# EAGLE board Creaky-Capreolus.postroute (EAGLE 7.4.0)
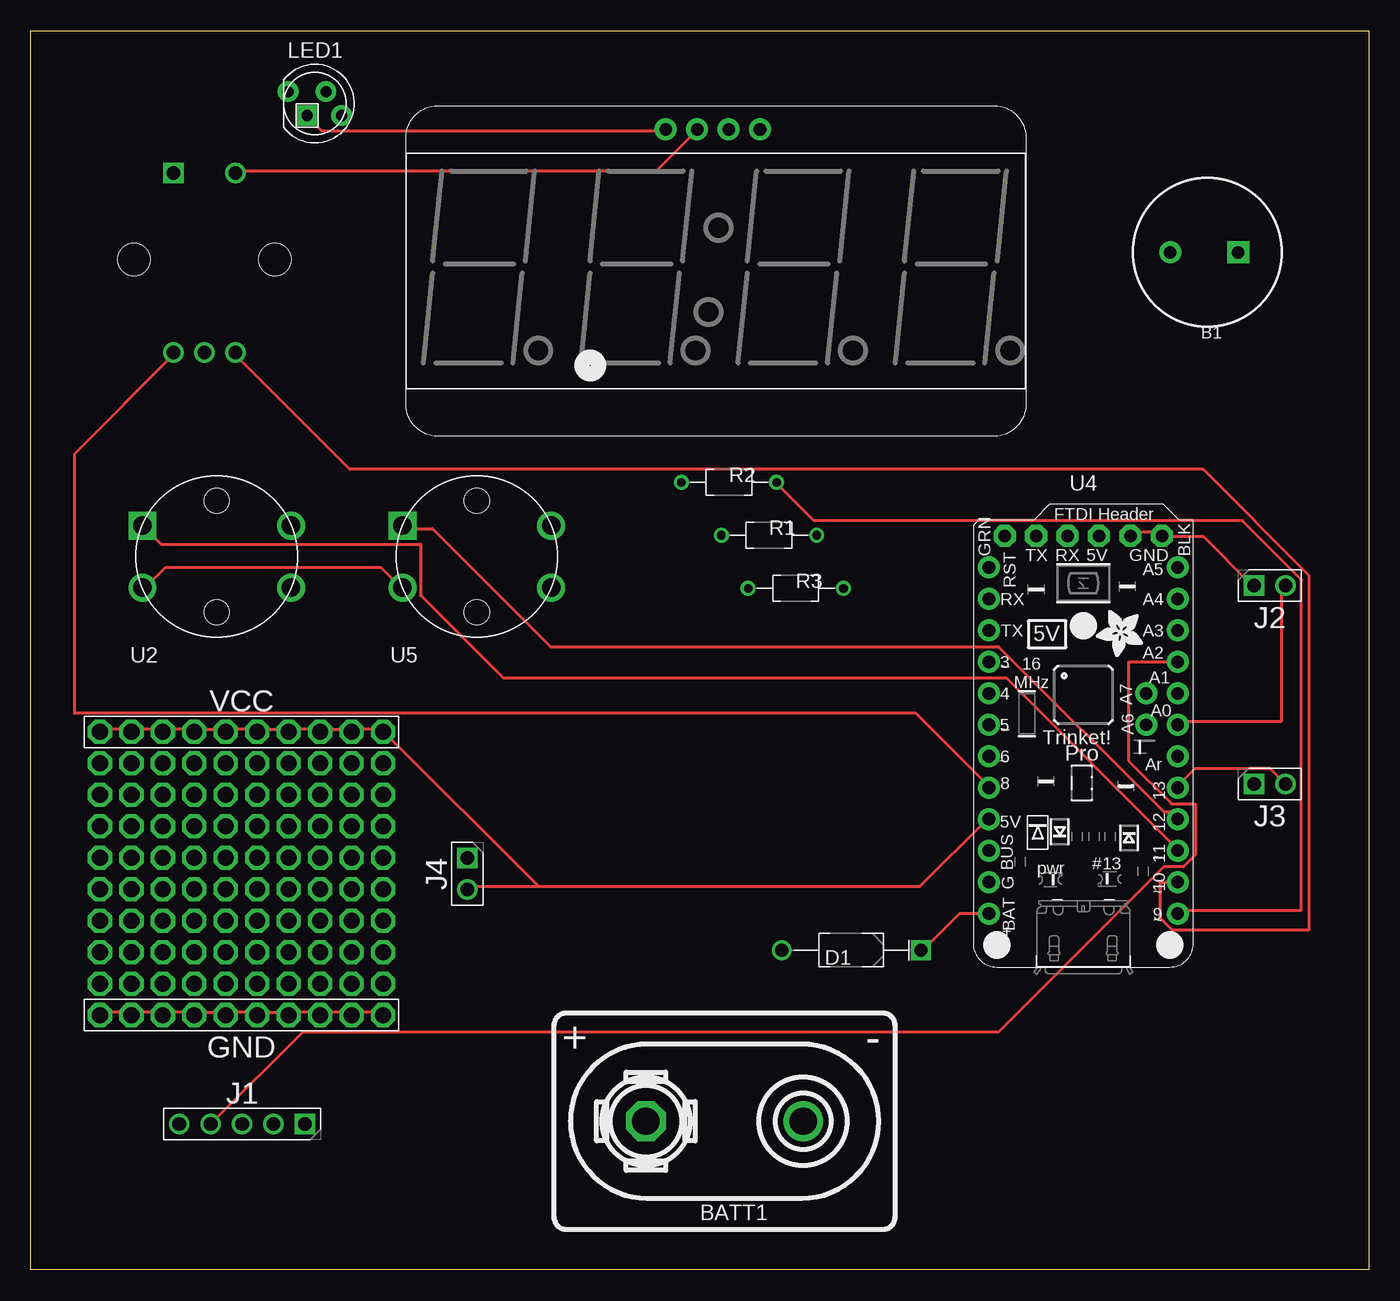
[diagram p0: board, top side]
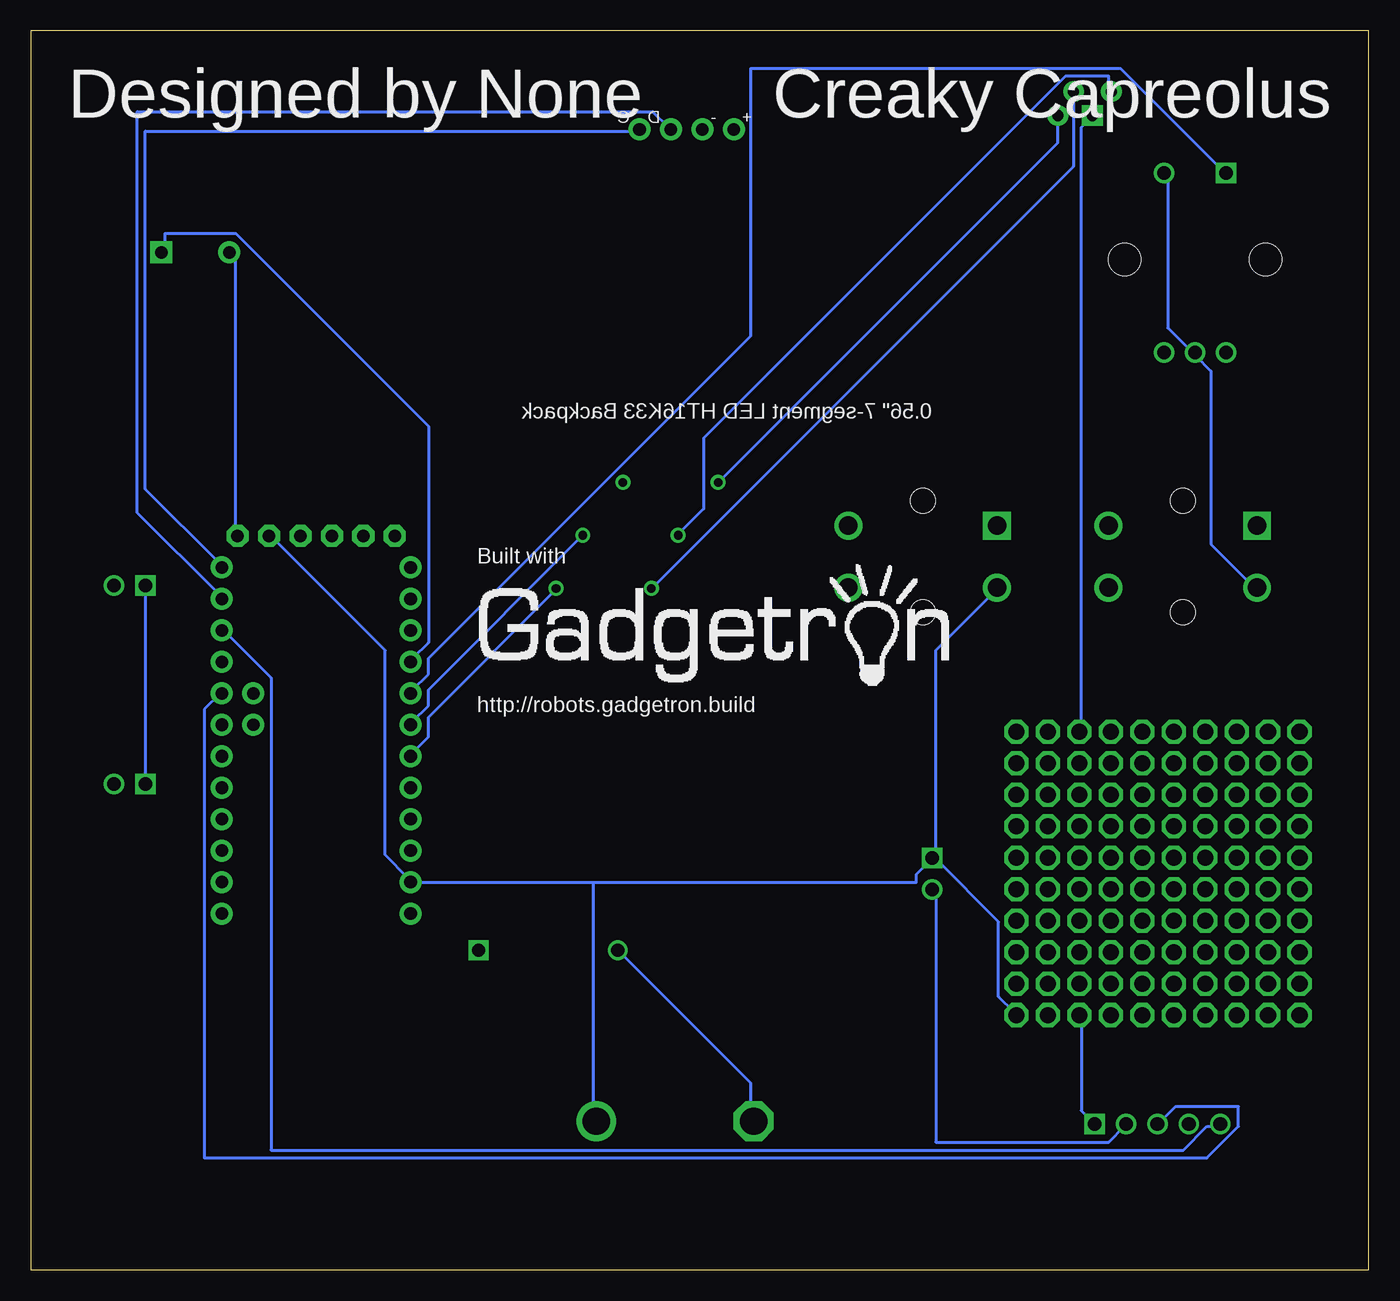
[diagram p1: board, bottom side, seen from below]

Size 108 x 100 mm. Coordinates in mm from the lower left corner, seen from the top.
Outline: 0,0 0,100 108,100 108,0 0,0
Copper layers (1*16): Top 0.035mm / dielectric 1.5mm / Bottom 0.035mm
Design rules "default": minimum track width 10mil, minimum drill 0.6mm, track to track 8mil, track to pad 8mil, pad to pad 8mil, via to via 8mil, smd to smd 8mil, copper to edge 40mil, drill to drill 8mil, minimum pad ring 10mil, minimum via ring 8mil, stop-mask expansion 4mil, vias tented up to drill 0mil, thermal gap 10mil

## Footprints (pad centres in the part's own frame; a part is rotated, then mirrored left to right if it is on the bottom)
BUZZER-12MM-ADAFRUIT-160 = drill 1 pad 1.778 square: + 2.5,0 | drill 1 pad 1.778: - -3,0
BATTERY_9V_KEYSTONE_968 = drill 2.2: N 6.35,0 | drill 2.2 octagon: P -6.35,0
DIOAD1125W78L520D270_HS = drill 1.06 pad 1.59: A 5.625,0 | drill 1.06 pad 1.59 square: C -5.625,0
HDRV5W63P254_5X1_1270X254H838_HS = drill 1.1 pad 1.65 square: 1 0,0 | drill 1.1 pad 1.65: 2 2.54,0; 3 5.08,0; 4 7.62,0; 5 10.16,0
HDRV2W63P254_2X1_508X254H838_HS = drill 1.1 pad 1.65 square: 1 0,0 | drill 1.1 pad 1.65: 2 2.54,0
LED5MMRGB = drill 0.9 pad 1.676: 1 -2.159,0.968; 3 0.889,0.968; 4 2.159,-0.968 | drill 0.9 pad 1.676 square: 2 -0.635,-0.968
RESAD770W45L370D210_HS = drill 0.7 pad 1.1: 1 -3.85,0; 2 3.85,0
PROTO-AREA-10X10 = drill 1.3 octagon: P$1 0,0; P$2 2.54,0; P$3 5.08,0; P$4 7.62,0; P$5 10.16,0; P$6 12.7,0; P$7 15.24,0; P$8 17.78,0; P$9 20.32,0; P$10 22.86,0; P$11 0,22.86; P$12 2.54,22.86; P$13 5.08,22.86; P$14 7.62,22.86; P$15 10.16,22.86; P$16 12.7,22.86; P$17 15.24,22.86; P$18 17.78,22.86; P$19 20.32,22.86; P$20 22.86,22.86; P$21 0,2.54; P$22 2.54,2.54; P$23 5.08,2.54; P$24 7.62,2.54; P$25 10.16,2.54; P$26 12.7,2.54; P$27 15.24,2.54; P$28 17.78,2.54; P$29 20.32,2.54; P$30 22.86,2.54; P$31 22.86,5.08; P$32 20.32,5.08; P$33 17.78,5.08; P$34 15.24,5.08; P$35 12.7,5.08; P$36 10.16,5.08; P$37 7.62,5.08; P$38 5.08,5.08; P$39 2.54,5.08; P$40 0,5.08; P$41 0,7.62; P$42 2.54,7.62; P$43 5.08,7.62; P$44 7.62,7.62; P$45 10.16,7.62; P$46 12.7,7.62; P$47 15.24,7.62; P$48 17.78,7.62; P$49 20.32,7.62; P$50 22.86,7.62; P$51 22.86,10.16; P$52 20.32,10.16; P$53 17.78,10.16; P$54 15.24,10.16; P$55 12.7,10.16; P$56 10.16,10.16; P$57 7.62,10.16; P$58 5.08,10.16; P$59 2.54,10.16; P$60 0,10.16; P$61 0,12.7; P$62 2.54,12.7; P$63 5.08,12.7; P$64 7.62,12.7; P$65 10.16,12.7; P$66 12.7,12.7; P$67 15.24,12.7; P$68 17.78,12.7; P$69 20.32,12.7; P$70 22.86,12.7; P$71 22.86,15.24; P$72 20.32,15.24; P$73 17.78,15.24; P$74 15.24,15.24; P$75 12.7,15.24; P$76 10.16,15.24; P$77 7.62,15.24; P$78 5.08,15.24; P$79 2.54,15.24; P$80 0,15.24; P$81 0,17.78; P$82 2.54,17.78; P$83 5.08,17.78; P$84 7.62,17.78; P$85 10.16,17.78; P$86 12.7,17.78; P$87 15.24,17.78; P$88 17.78,17.78; P$89 20.32,17.78; P$90 22.86,17.78; P$91 22.86,20.32; P$92 20.32,20.32; P$93 17.78,20.32; P$94 15.24,20.32; P$95 12.7,20.32; P$96 10.16,20.32; P$97 7.62,20.32; P$98 5.08,20.32; P$99 2.54,20.32; P$100 0,20.32
BUTTON-TACTILE-ROUND-ADAFRUIT1009 = drill 1.5 square: P -6,2.5 | drill 1.5: P2 6,2.5; S -6,-2.5; S2 6,-2.5 | hole 2: 0,-4.5; 0,4.5
ROTARY-ENCODER-W/BUTTON-ADAFRUIT377 = drill 1.1: A -2.5,-7.5; B 2.5,-7.5; BUTB 2.5,7; COMMON 0,-7.5 | drill 1.1 square: BUTA -2.5,7 | hole 2.6: -5.7,0; 5.7,0
ADAFRUIT-PRO-TRINKET-5V = drill 1.016 pad 1.778: +5V 7.62,24.13; A0 -7.62,16.51; A1 -7.62,13.97; A2 -7.62,11.43; A3 -7.62,8.89; A4 -7.62,6.35; A5 -7.62,3.81; AREF -7.62,19.05; D3 7.62,11.43; D4 7.62,13.97; D5 7.62,16.51; D6 7.62,19.05; D8 7.62,21.59; D9 -7.62,31.75; D10 -7.62,29.21; D11 -7.62,26.67; D12 -7.62,24.13; D13 -7.62,21.59; GND2 7.62,29.21; RESET 7.62,3.81; RXD1 7.62,6.35; TXD1 7.62,8.89; VBAT 7.62,31.75; VBUS1 7.62,26.67 | drill 1 pad 1.778: A6 -5.08,16.51; A7 -5.08,13.97 | drill 1.016 pad 1.778 octagon: DTR/RTS 6.35,1.27; GND -6.35,1.27; GND1 -3.81,1.27; RXD 1.27,1.27; TXD 3.81,1.27; VBUS -1.27,1.27
ADAFRUIT-7SEG-BACKPACK = drill 1.016 pad 1.778: GND -1.524,11.43; SCL 3.556,11.43; SDA 1.016,11.43; VDD -4.064,11.43

## Placement (x,y rotation side)
B1  BUZZER-ADAFRUIT-160  [BUZZER-12MM-ADAFRUIT-160]  94.98,82.13 0 top
BATT1  BATTERY-9V-VERTICAL  [BATTERY_9V_KEYSTONE_968]  56,12 0 top
D1  [DIOAD1125W78L520D270_HS]  66.24,25.81 180 top
J1  [HDRV5W63P254_5X1_1270X254H838_HS]  22.13,11.77 180 top
J2  [HDRV2W63P254_2X1_508X254H838_HS]  98.76,55.23 0 top
J3  [HDRV2W63P254_2X1_508X254H838_HS]  98.76,39.23 0 top
J4  [HDRV2W63P254_2X1_508X254H838_HS]  35.23,33.24 270 top
LED1  RGBLED_CA-5MM  [LED5MMRGB]  22.93,94.14 0 top
LOGO  [BUILT_WITH_GADGETRON]  54,50 0 bottom
R1  150  [RESAD770W45L370D210_HS]  59.59,59.3 0 top
R2  100  [RESAD770W45L370D210_HS]  56.36,63.57 0 top
R3  100  [RESAD770W45L370D210_HS]  61.75,55 0 top
U1  PROTO-AREA-10X10  [PROTO-AREA-10X10]  5.57,20.57 0 top
U2  BUTTON-TACTILE-ROUND  [BUTTON-TACTILE-ROUND-ADAFRUIT1009]  15,57.57 0 top
U3  ROTARY-ENCODER-W/BUTTON-ADAFRUIT377  [ROTARY-ENCODER-W/BUTTON-ADAFRUIT377]  14,81.55 0 top
U4  ADAFRUIT-PRO-TRINKET-5V-BOB  [ADAFRUIT-PRO-TRINKET-5V]  84.97,60.51 180 top
U5  BUTTON-TACTILE-ROUND  [BUTTON-TACTILE-ROUND-ADAFRUIT1009]  36,57.57 0 top
U6  ADAFRUIT-7SEG-BACKPACK-RED  [ADAFRUIT-7SEG-BACKPACK]  55.31,80.63 0 top

## Library data of the parts
B1 = Components; DIST: Adafruit; DISTPN: 160; HIERARCHY_NAME: buzzer.u1
BATT1 = Components; DIST: Digikey; DISTPN: 36-968-ND; HIERARCHY_NAME: battery.BATT1
D1 = KoalaBuild; DATASHEET: http://www.st.com/web/en/resource/technical/document/datasheet/CD00001625.pdf; DATA_SHEET: http://www.st.com/web/en/resource/technical/document/datasheet/CD00001625.pdf; DB: /home/buildserver/gtron_devel/Gadgets/Tools/Koala/Koala/PartLibrary/Digikey/Schottky-Diodes-TH.csv; DEVICE: TH-DO-41-AND-DO-204AL; DIST: Digikey; DISTPN: 497-4547-1-ND; HIERARCHY_NAME: battery.D1; IMAGE: http://media.digikey.com/photos/STMicro%20Photos/1N5819.JPG; IRECT: 1A; MFR: STMicroelectronics; MIN_QTY: 1; MPN: 1N5817; PACKAGE: DIOAD1125W78L520D270_HS; PRICE: $0.57; SIZE: TH; STOCK: STOCK; VALUE: 450mV; VREV: 20V
J1 = Components; DIST: Digikey; DISTPN: S6103-ND; HIERARCHY_NAME: digital_2.J1; PIN1: GND; PIN2: D1; PIN3: D2; PIN4: D3; PIN5: D4
J2 = Components; DIST: Digikey; DISTPN: S7000-ND; HIERARCHY_NAME: analog.J1; PIN1: GND; PIN2: A1
J3 = Components; DIST: Digikey; DISTPN: S7000-ND; HIERARCHY_NAME: digital.J1; PIN1: GND; PIN2: D1
J4 = Components; DIST: Digikey; DISTPN: S7000-ND; HIERARCHY_NAME: power.J1; PIN1: GND; PIN2: VDD
LED1 = Components; DIST: Adafruit; DISTPN: 302; HIERARCHY_NAME: led_2.LED1
LOGO = Artwork
R1 = KoalaBuild; CASE: TH; DATASHEET: http://www.yageo.com/NewPortal/yageodocoutput?fileName=/pdf/throughhole/Yageo_LR_CFR_2013.pdf; DATA_SHEET: http://www.yageo.com/NewPortal/yageodocoutput?fileName=/pdf/throughhole/Yageo_LR_CFR_2013.pdf; DB: /home/buildserver/gtron_devel/Gadgets/Tools/Koala/Koala/PartLibrary/Digikey/Resistors-TH.csv; DEVICE: TH-1/6W-CARBON; DIST: Digikey; DISTPN: 150EBK-ND; HIERARCHY_NAME: led_2.U$3; IMAGE: http://media.digikey.com/Renders/Yageo%20Renders/CFR-12JR-150R.jpg; MFR: Yageo; MIN_QTY: 1; MPN: CFR-12JB-52-150R; PACKAGE: RESAD770W45L370D210_HS; PRICE: $0.10; PWR: 167mW; SIZE: TH; STOCK: STOCK; TOL: 5%; VALUE_QUERY: 150
R2 = KoalaBuild; CASE: TH; DATASHEET: http://www.yageo.com/NewPortal/yageodocoutput?fileName=/pdf/throughhole/Yageo_LR_CFR_2013.pdf; DATA_SHEET: http://www.yageo.com/NewPortal/yageodocoutput?fileName=/pdf/throughhole/Yageo_LR_CFR_2013.pdf; DB: /home/buildserver/gtron_devel/Gadgets/Tools/Koala/Koala/PartLibrary/Digikey/Resistors-TH.csv; DEVICE: TH-1/6W-CARBON; DIST: Digikey; DISTPN: 100EBK-ND; HIERARCHY_NAME: led_2.U$1; IMAGE: http://media.digikey.com/Renders/Yageo%20Renders/CFR-12JR-100R.jpg; MFR: Yageo; MIN_QTY: 1; MPN: CFR-12JB-52-100R; PACKAGE: RESAD770W45L370D210_HS; PRICE: $0.10; PWR: 167mW; SIZE: TH; STOCK: STOCK; TOL: 5%; VALUE_QUERY: 100
R3 = KoalaBuild; CASE: TH; DATASHEET: http://www.yageo.com/NewPortal/yageodocoutput?fileName=/pdf/throughhole/Yageo_LR_CFR_2013.pdf; DATA_SHEET: http://www.yageo.com/NewPortal/yageodocoutput?fileName=/pdf/throughhole/Yageo_LR_CFR_2013.pdf; DB: /home/buildserver/gtron_devel/Gadgets/Tools/Koala/Koala/PartLibrary/Digikey/Resistors-TH.csv; DEVICE: TH-1/6W-CARBON; DIST: Digikey; DISTPN: 100EBK-ND; HIERARCHY_NAME: led_2.U$2; IMAGE: http://media.digikey.com/Renders/Yageo%20Renders/CFR-12JR-100R.jpg; MFR: Yageo; MIN_QTY: 1; MPN: CFR-12JB-52-100R; PACKAGE: RESAD770W45L370D210_HS; PRICE: $0.10; PWR: 167mW; SIZE: TH; STOCK: STOCK; TOL: 5%; VALUE_QUERY: 100
U1 = Components; DIST: Gadgetron; DISTPN: proto-area-10x10; HIERARCHY_NAME: proto_area.u1
U2 = Components; DIST: Adafruit; DISTPN: 1009; HIERARCHY_NAME: button.B1
U3 = Components; DIST: Adafruit; DISTPN: 377; HIERARCHY_NAME: knob.U1
U4 = BOBs; DIST: Adafruit; DISTPN: 2000; HIERARCHY_NAME: brain.U1
U5 = Components; DIST: Adafruit; DISTPN: 1009; HIERARCHY_NAME: button_2.B1
U6 = BOBs; DIST: Adafruit; DISTPN: 878; HIERARCHY_NAME: display.u1

## Nets
+5V_0_BRAIN: J1.2 J4.2 LED1.2 U1.P$11 U1.P$12 U1.P$13 U1.P$14 U1.P$15 U1.P$16 U1.P$17 U1.P$18 U1.P$19 U1.P$20 U4.+5V U6.VDD
A0_0_BRAIN: J2.2 U4.A0
A1_0_BRAIN: J1.3 U4.A1
A2_0_BRAIN: J1.4 U4.A2
A3_0_BRAIN: J1.5 U4.A3
A4_0_BRAIN: U4.A4 U6.SDA
A5_0_BRAIN: U4.A5 U6.SCL
A6_0_BRAIN: U4.A6
A7_0_BRAIN: U4.A7
AREF_0_BRAIN: U4.AREF
D3_0_BRAIN: B1.+ U4.D3
D4_0_BRAIN: U3.BUTA U4.D4
D5_0_BRAIN: R1.2 U4.D5
D6_0_BRAIN: R3.2 U4.D6
D8_0_BRAIN: U3.A U4.D8
D9_0_BRAIN: R2.2 U4.D9
D10_0_BRAIN: U3.B U4.D10
D11_0_BRAIN: U2.P U4.D11
D12_0_BRAIN: U4.D12 U5.P
D13_0_BRAIN: J3.2 U4.D13
DTR/RTS_0_BRAIN: U4.DTR/RTS
GND_0_BRAIN: B1.- BATT1.N J1.1 J2.1 J3.1 J4.1 U1.P$1 U1.P$2 U1.P$3 U1.P$4 U1.P$5 U1.P$6 U1.P$7 U1.P$8 U1.P$9 U1.P$10 U2.S U3.BUTB U3.COMMON U4.GND U4.GND1 U4.GND2 U5.S U6.GND
N$1_1_BATTERY: BATT1.P D1.A
N$1_5_LED_2: LED1.4 R2.1
N$2_5_LED_2: LED1.3 R3.1
N$3_5_LED_2: LED1.1 R1.1
POS_1_BATTERY: D1.C U4.VBAT
RESET_0_BRAIN: U4.RESET
RXD1_0_BRAIN: U4.RXD1
RXD_0_BRAIN: U4.RXD
TXD1_0_BRAIN: U4.TXD1
TXD_0_BRAIN: U4.TXD
VBUS1_0_BRAIN: U4.VBUS1
VBUS_0_BRAIN: U4.VBUS

## Tracks (layer width: path | path; a pad name or v marks a point on that pad's centre or on a via)
+5V_0_BRAIN
  Top 0.254: 40.98,30.95 28.6,43.33 U1.P$20 28.28,43.65 26.06,43.65 U1.P$19 25.74,43.65 23.52,43.65 U1.P$18 23.2,43.65 20.98,43.65 U1.P$17 20.66,43.65 18.44,43.65 U1.P$16 18.12,43.65 15.9,43.65 U1.P$15 15.58,43.65 13.36,43.65 U1.P$14 13.04,43.65 10.82,43.65 U1.P$13 10.5,43.65 8.28,43.65 U1.P$12 7.96,43.65 5.74,43.65 U1.P$11 | 40.98,30.95 71.78,30.95 77.18,36.35 U4.+5V | 40.98,30.95 35.27,30.95 J4.2 | U6.VDD 51.14,91.91 23.52,91.91 22.57,92.86 LED1.2
  Bottom 0.254: J4.2 34.95,30.63 34.95,10.31 20.98,10.31 19.71,11.58 J1.2 | U1.P$18 23.2,43.65 23.2,92.23 22.57,92.86 LED1.2
A0_0_BRAIN
  Top 0.254: U4.A0 92.73,44.28 100.99,44.28 100.99,55.08 J2.2
A1_0_BRAIN
  Bottom 0.254: J1.3 16.85,11.9 15.58,13.17 10.5,13.17 10.5,11.58 13.04,9.04 94,9.04 94,45.24 92.73,46.51 U4.A1
A2_0_BRAIN
  Top 0.254: J1.4 14.63,11.9 21.93,19.2 78.13,19.2 91.47,32.54 93.05,32.54 94,33.49 94,37.62 92.1,37.62 88.61,41.11 88.61,49.05 92.42,49.05 U4.A2
A3_0_BRAIN
  Bottom 0.254: J1.5 12.09,11.58 13.04,11.58 14.95,9.68 88.61,9.68 88.61,47.78 92.42,51.59 U4.A3
A4_0_BRAIN
  Bottom 0.254: U6.SDA 56.54,92.23 57.81,93.5 99.4,93.5 99.4,61.11 92.73,54.45 U4.A4
A5_0_BRAIN
  Bottom 0.254: U4.A5 92.73,56.98 98.77,63.02 98.77,91.91 59.08,91.91 U6.SCL
D3_0_BRAIN
  Bottom 0.254: U4.D3 77.18,49.37 75.91,50.63 75.91,68.1 91.47,83.66 97.18,83.66 97.18,82.38 B1.+
D4_0_BRAIN
  Bottom 0.254: U3.BUTA 11.77,88.73 20.03,96.99 49.87,96.99 49.87,75.4 75.91,49.37 75.91,48.09 77.18,46.83 U4.D4
D5_0_BRAIN
  Bottom 0.254: U4.D5 77.18,44.28 75.91,45.55 75.91,46.83 63.52,59.21 R1.2
D6_0_BRAIN
  Bottom 0.254: R3.2 65.75,54.76 75.91,44.6 75.91,43.02 77.18,41.74 U4.D6
D8_0_BRAIN
  Top 0.254: U3.A 11.45,73.81 3.52,65.88 3.52,44.92 71.46,44.92 77.18,39.2 U4.D8
D9_0_BRAIN
  Top 0.254: U4.D9 92.73,29.05 102.58,29.05 102.58,55.72 97.81,60.48 63.21,60.48 60.35,63.34 R2.2
D10_0_BRAIN
  Top 0.254: U3.B 16.53,73.81 25.74,64.61 94.64,64.61 103.21,56.03 103.21,27.46 92.1,27.46 91.15,28.41 91.15,31.27 92.42,31.27 U4.D10
D11_0_BRAIN
  Top 0.254: U2.P 9.23,59.84 10.5,58.57 31.46,58.57 31.46,54.45 38.12,47.78 78.77,47.78 92.42,34.12 U4.D11
D12_0_BRAIN
  Top 0.254: U5.P 30.19,59.84 32.41,59.84 41.94,50.32 78.13,50.32 91.47,36.98 92.1,36.98 92.42,36.66 U4.D12
D13_0_BRAIN
  Top 0.254: U4.D13 92.73,39.2 94,40.48 100.04,40.48 100.99,39.52 J3.2
GND_0_BRAIN
  Top 0.254: U6.GND 53.68,91.91 50.51,88.73 16.53,88.73 U3.BUTB | U5.S 29.87,55.08 28.28,56.67 10.82,56.67 9.23,55.08 U2.S | U1.P$10 28.28,20.79 26.06,20.79 U1.P$9 25.74,20.79 23.52,20.79 U1.P$8 23.2,20.79 20.98,20.79 U1.P$7 20.66,20.79 18.44,20.79 U1.P$6 18.12,20.79 15.9,20.79 U1.P$5 15.58,20.79 13.36,20.79 U1.P$4 13.04,20.79 10.82,20.79 U1.P$3 10.5,20.79 8.28,20.79 U1.P$2 7.96,20.79 5.74,20.79 U1.P$1 | U4.GND1 88.92,59.52 91.15,59.52 U4.GND 91.47,59.21 94.64,59.21 98.45,55.4 J2.1
  Bottom 0.254: 62.57,31.27 36.54,31.27 36.54,31.9 35.27,33.17 J4.1 | J4.1 34.95,33.49 34.95,50 30.19,54.76 U5.S | J4.1 34.95,33.17 29.87,28.09 29.87,22.06 28.6,20.79 U1.P$10 | U1.P$8 23.2,20.47 23.2,12.85 22.25,11.9 J1.1 | U3.BUTB 16.22,88.42 16.22,76.03 14.31,74.13 U3.COMMON 13.99,73.81 12.73,72.54 12.73,58.57 9.23,55.08 U2.S | U4.GND1 88.61,59.21 79.4,50 79.4,33.49 77.5,31.59 U4.GND2 77.18,31.27 62.57,31.27 | U4.GND 91.47,59.52 91.47,81.75 91.78,82.07 B1.- | J3.1 98.77,39.52 98.77,55.08 J2.1 | BATT1.N 62.57,12.22 62.57,31.27
N$1_1_BATTERY
  Bottom 0.254: BATT1.P 49.87,12.22 49.87,15.08 60.35,25.55 D1.A
N$1_5_LED_2
  Bottom 0.254: R2.1 52.41,63.65 25.11,90.96 25.11,92.86 LED1.4
N$2_5_LED_2
  Bottom 0.254: LED1.3 23.84,95.09 23.84,89.05 57.81,55.08 R3.1
N$3_5_LED_2
  Bottom 0.254: LED1.1 20.98,95.4 20.98,96.35 24.47,96.35 53.68,67.14 53.68,61.43 55.59,59.52 R1.1
POS_1_BATTERY
  Top 0.254: D1.C 72.1,25.87 74.95,28.73 77.18,28.73 U4.VBAT

## Text on the board
bPlace: Creaky Capreolus | Designed by None